# EAGLE board Si4707_WeatherBandRadioBoardv1 (EAGLE 5.10)

Size 100 x 80 mm. Coordinates in mm from the lower left corner, seen from the top.
Outline: 0,0 100,0 100,80 0,80 0,0
Copper layers (1*16): Top 0.035mm / dielectric 1.5mm / Bottom 0.035mm
Design rules "default": minimum track width 10mil, minimum drill 24mil, track to track 8mil, track to pad 8mil, pad to pad 8mil, via to via 8mil, smd to smd 8mil, copper to edge 40mil, drill to drill 8mil, minimum pad ring 10mil, minimum via ring 8mil, stop-mask expansion 4mil, vias tented up to drill 0mil, thermal gap 10mil

## Footprints (pad centres in the part's own frame; a part is rotated, then mirrored left to right if it is on the bottom)
C603 = smd 1.1 x 1: 1 -0.85,0; 2 0.85,0
86SMX = smd 2.286 x 2.184: 1 -5.08,-2.286; 4 -5.08,2.286 | smd 3.556 x 2.184: 2 4.318,-2.286; 3 4.318,2.286
QFN-20 = smd 1.7 x 1.7: 0 0,0 | smd 0.34 x 0.34: 1 -1.265,1.265; 6 -1.265,-1.265; 11 1.265,-1.265; 16 1.265,1.265 | smd 0.61 x 0.28: 2 -1.355,0.75; 3 -1.355,0.25; 4 -1.355,-0.25; 5 -1.355,-0.75; 12 1.355,-0.75; 13 1.355,-0.25; 14 1.355,0.25; 15 1.355,0.75 | smd 0.28 x 0.61: 7 -0.75,-1.355; 8 -0.25,-1.355; 9 0.25,-1.355; 10 0.75,-1.355; 17 0.75,1.355; 18 0.25,1.355; 19 -0.25,1.355; 20 -0.75,1.355

## Placement (x,y rotation side)
C1  22nF  [C603]  57.15,40.64 270 top
C2  22pF  [C603]  52.07,46.99 0 top
C3  22pF  [C603]  44.45,36.83 270 top
Q1  32.768KHz  [86SMX]  38.1,41.91 180 top
U1  SI4707  [QFN-20]  53.34,40.64 0 top

## Library data of the parts
C1-C3 U1 = dp_devices
Q1 = crystal; MF: C-MAC FREQUENCY PRODUCTS LTD; MPN: XTAL003321- 86SMX; OC_FARNELL: 6344914; OC_NEWARK: 01H9866

## Nets
GND: C1.1 C2.1 C3.1 U1.0 U1.3 U1.4 U1.12 U1.15 U1.16
GPO1: U1.19
GPO2: U1.18
GPO3: C2.2 Q1.1 U1.17
LOUT: U1.14
RCLK: C3.2 Q1.4 U1.9
ROUT: U1.13
RST: U1.5
SCLK: U1.7
SDIO: U1.8
SEN: U1.6
VDD: C1.2 U1.11
VIO: U1.10

## Tracks (layer width: path | path; a pad name or v marks a point on that pad's centre or on a via)
GND  (8 unrouted)
GPO3  (2 unrouted)
RCLK  (2 unrouted)
VDD  (1 unrouted)